# Altium PCB ButtonBoard.PcbDoc
Units mm, origin at the board's own origin, x right, y up, seen from the top; angles counter-clockwise.
Board outline 75 x 40 mm, 2 copper layers (Top Layer, Bottom Layer); 18 components, 18 nets, 76 pads, 0 vias.
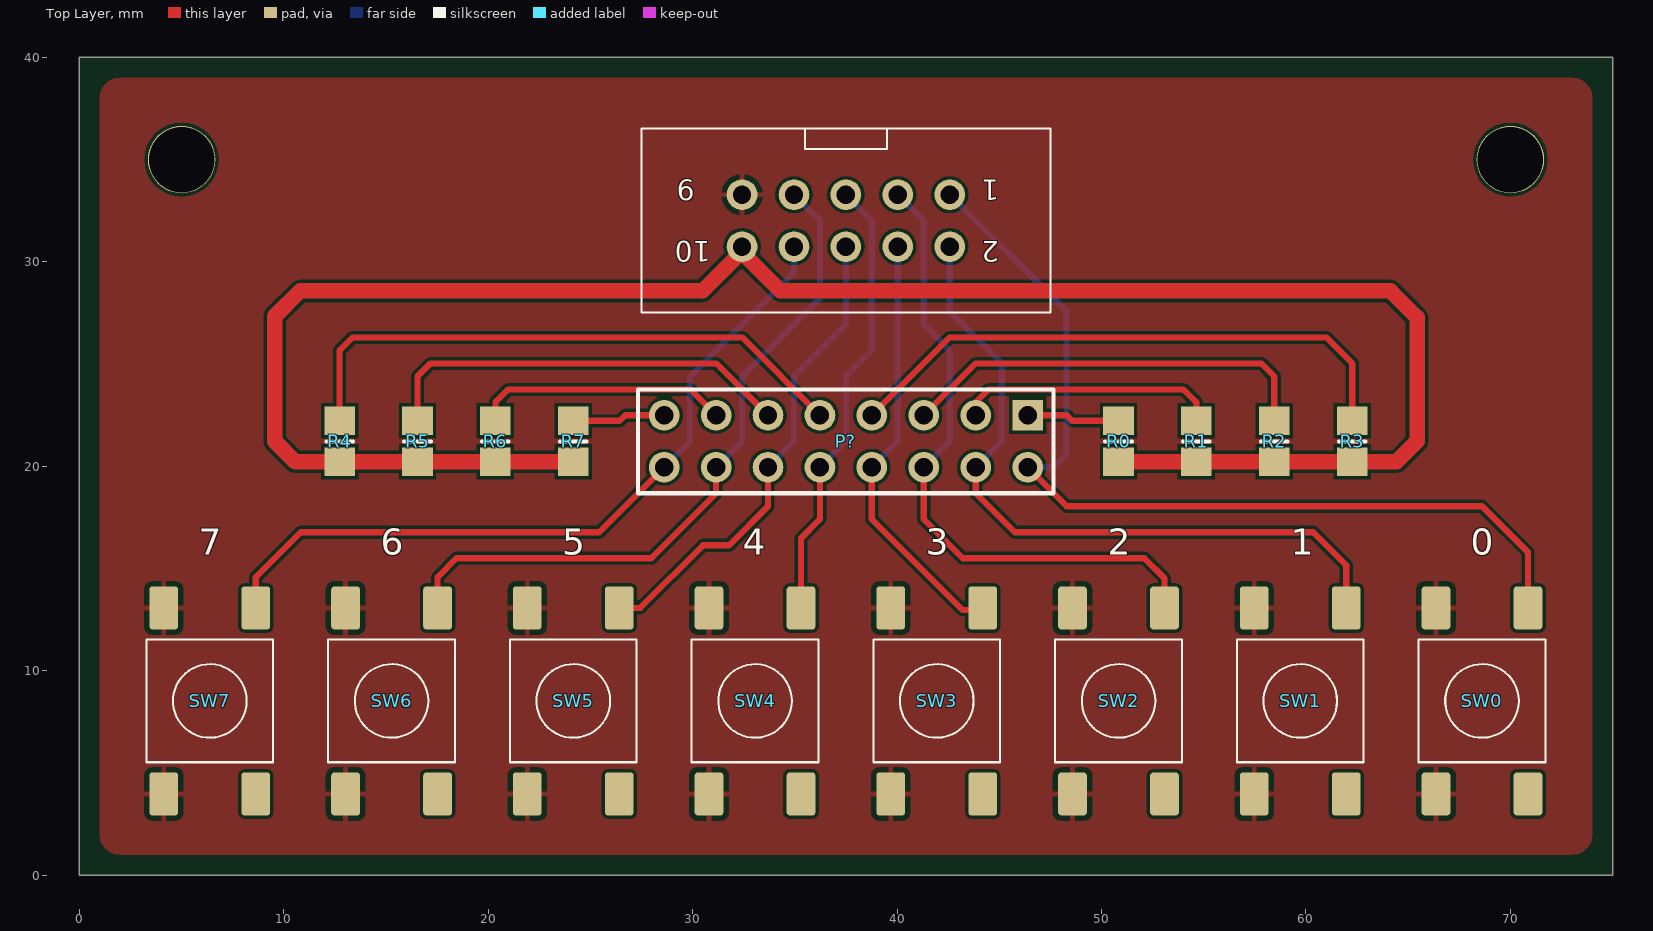
[diagram p0: Top Layer view]
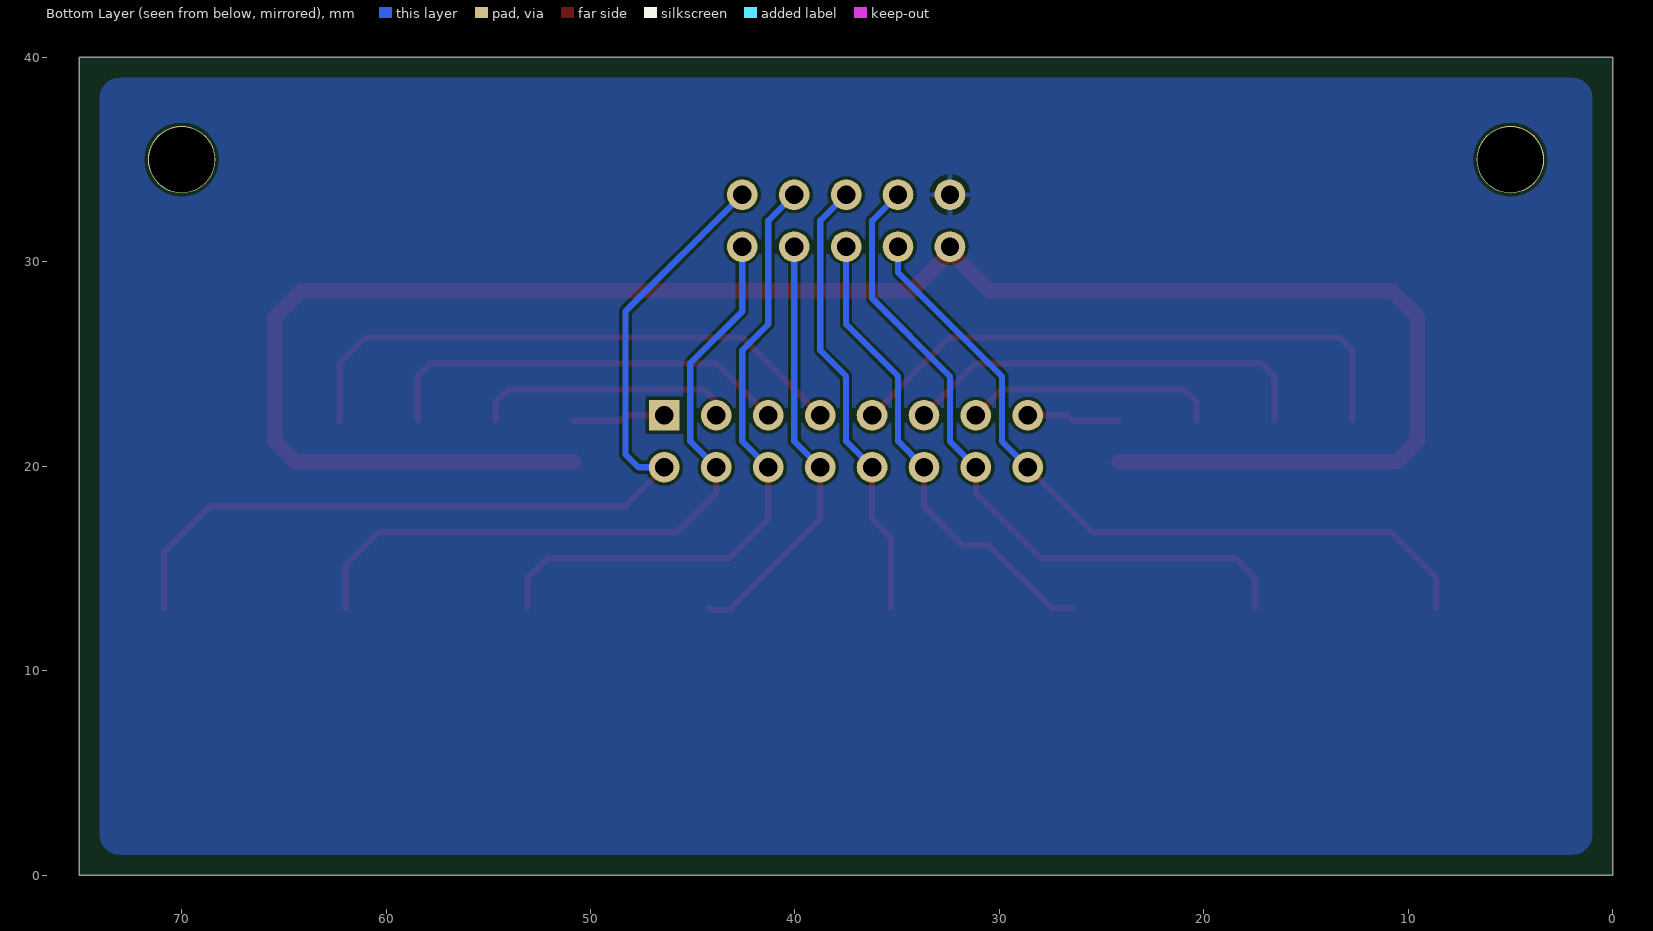
[diagram p1: Bottom Layer view, seen from below]

## Layer stack, top to bottom
Top Layer: signal copper 0.0356
Dielectric: dielectric 0.32, FR-4, Dk 4.8
Bottom Layer: signal copper 0.0356

## Board outline
0,0 75,0 75,40 0,40

## Design rules (kind name [scope] priority, off if disabled: settings)
Clearance [All] p1: gap=0.152
Height [All] p1: minheight=0 maxheight=100 prefheight=12.7
HoleSize [All] p1: absolutevalues=TRUE maxlimit=5 minlimit=0.025 maxpercent=80.000 minpercent=20.000
MinimumSolderMaskSliver [All] p1: minsoldermaskwidth=0.152
PolygonConnect [All] p1: connectstyle=Relief reliefconductorwidth=0.254 reliefentries=4 polygonreliefangle="90 Angle" airgapwidth=0.254
RoutingVias [All] p1: holewidth=0.711 width=1.27 viastyle="Through Hole" minholewidth=0.711 minwidth=1.27 maxholewidth=0.711 maxwidth=1.27
SilkToSilkClearance [All] p1 off: silktosilkclearance=0.152
SilkscreenOverComponentPads [All] p1 off: minsilkscreentomaskgap=0.152
SolderMaskExpansion [All] p1: expansion=0.102
Width [All] p1: maxlimit=2 minlimit=0.152 preferedwidth=0.254
23 further rules are at their usual default settings.

## Components (designator, comment, footprint, x,y, rotation, side; value= is the part's Value field where it differs from the comment)
P? "Header 8X2" HDR2X8 46.385,22.49 r180 top
R0 "Res2" 6-0805_M 50.83,21.22 r90 top
R1 "Res2" 6-0805_M 54.64,21.22 r90 top
R2 "Res2" 6-0805_M 58.45,21.22 r90 top
R3 "Res2" 6-0805_M 62.26,21.22 r90 top
R4 "Res2" 6-0805_M 12.73,21.22 r90 top
R5 "Res2" 6-0805_M 16.54,21.22 r90 top
R6 "Res2" 6-0805_M 20.35,21.22 r90 top
R7 "Res2" 6-0805_M 24.16,21.22 r90 top
SW0 "Generic SMD Switch" "SMD Switch" 68.61,8.52 r90 top
SW1 "Generic SMD Switch" "SMD Switch" 59.72,8.52 r90 top
SW2 "Generic SMD Switch" "SMD Switch" 50.83,8.52 r90 top
SW3 "Generic SMD Switch" "SMD Switch" 41.94,8.52 r90 top
SW4 "Generic SMD Switch" "SMD Switch" 33.05,8.52 r90 top
SW5 "Generic SMD Switch" "SMD Switch" 24.16,8.52 r90 top
SW6 "Generic SMD Switch" "SMD Switch" 15.27,8.52 r90 top
SW7 "Generic SMD Switch" "SMD Switch" 6.38,8.52 r90 top
? "10 pol Header" "10 pol Header" 37.495,32.015 r180 top

## Footprints (in the part's own frame and the unit in brackets; to place one, negate y for a bottom-side part, rotate by r counter-clockwise, add the part's x,y. Pads: shape width x height; smd on the part's side, far side on the other; paste and mask are expansions set on the pad)
6-0805_M [mm] "Chip Resistor, Body 2.0x1.2mm, IPC Low Density"
  rect 1.4x1.5 smd: 1(-1,0) 2(1,0)
  silkscreen extent 0,-0.65 0,0.65, body extent -1.07,-0.7 1.07,0.7, height 0.7
"10 pol Header" [mm]
  round 1.5 hole 0.9: 1(-5.08,-1.27) 2(-5.08,1.27) 3(-2.54,-1.27) 4(-2.54,1.27) 5(0,-1.27) 6(0,1.27) 7(2.54,-1.27) 8(2.54,1.27) 9(5.08,-1.27) 10(5.08,1.27)
  silkscreen extent -10,-4.5 10,4.5, body extent -10,-4.5 10,4.5, height 9
HDR2X8 [mm] "Connector; Header; 8x2 Position"
  rect 1.5x1.5 hole 0.9: 1(0,0)
  round 1.5 hole 0.9: 2(0,2.54) 3(2.54,0) 4(2.54,2.54) 5(5.08,0) 6(5.08,2.54) 7(7.62,0) 8(7.62,2.54) 9(10.16,0) 10(10.16,2.54) 11(12.7,0) 12(12.7,2.54) 13(15.24,0) 14(15.24,2.54) 15(17.78,0) 16(17.78,2.54)
  silkscreen extent -1.27,-1.27 19.05,3.81
"SMD Switch" [mm]
  rrect20% 2.1x1.4 smd: 1(-4.55,2.25) 2(4.55,2.25) 3(-4.55,-2.25) 4(4.55,-2.25)
  silkscreen extent -3,-3.1 3,3.1

## Part data
P?: "Header, 8-Pin, Dual row"
R0 R1 R2 R3 R4 R5 R6 R7: "Resistor"

## Free pads (board coordinates)
  round 3.3 hole 3.2: 0(5,35) 0(70,35)

## Nets (pads, with @x,y where several pads share a name; then routed paths per layer and width w, separated by ;. In a path a pad name is that pad's centre, name@x,y a point inside that pad or via, vN(x,y) a via of type N, cw(c..) or ccw(c..) an arc to the next point about the centre after c; other vN are vias at no path point)
GND: ?.9 SW0.1 SW0.2 SW1.1 SW1.2 SW2.1 SW2.2 SW3.1 SW3.2 SW4.1 SW4.2 SW5.1 SW5.2 SW6.1 SW6.2 SW7.1 SW7.2
NetP?_1: P?.1 R0.2 | length 4.6
  Top Layer w0.305: P?.1 48.29,22.49 48.56,22.22 R0.2
NetP?_3: P?.3 R1.2 | length 12.9
  Top Layer w0.305: P?.3 43.845,23.125 44.48,23.76 54.005,23.76 54.64,23.125 R1.2
NetP?_5: P?.5 R2.2 | length 20.6
  Top Layer w0.305: P?.5 43.845,25.03 57.815,25.03 58.45,24.395 R2.2
NetP?_7: P?.7 R3.2 | length 28.4
  Top Layer w0.305: P?.7 42.575,26.3 60.99,26.3 62.26,25.03 R3.2
NetP?_9: P?.9 R4.2 | length 28.8
  Top Layer w0.305: R4.2 12.73,25.665 13.365,26.3 32.415,26.3 P?.9
NetP?_11: P?.11 R5.2 | length 20.6
  Top Layer w0.305: R5.2 16.54,24.395 17.175,25.03 31.145,25.03 P?.11
NetP?_13: P?.13 R6.2 | length 12.5
  Top Layer w0.305: R6.2 20.35,23.125 20.985,23.76 29.875,23.76 P?.13
NetP?_15: P?.15 R7.2 | length 4.6
  Top Layer w0.305: R7.2 26.43,22.22 26.7,22.49 P?.15
S0: ?.1 P?.2 SW0.4 | length 46.2
  Top Layer w0.305: P?.2 48.29,18.045 68.61,18.045 70.86,15.795 SW0.4
  Bottom Layer w0.305: ?.1 48.29,27.57 48.29,20.585 47.655,19.95 P?.2
S1: ?.2 P?.4 SW1.4 | length 35.3
  Top Layer w0.305: P?.4 43.845,18.68 45.75,16.775 60.355,16.775 61.97,15.16 SW1.4
  Bottom Layer w0.305: ?.2 42.575,28.84 42.575,27.57 45.115,25.03 45.115,21.22 P?.4
S2: ?.3 P?.6 SW2.4 | length 31.9
  Top Layer w0.305: P?.6 41.305,17.41 43.21,15.505 52.1,15.505 53.08,14.525 SW2.4
  Bottom Layer w0.305: ?.3 41.305,32.015 41.305,26.935 42.575,25.665 42.575,21.22 P?.6
S3: ?.4 P?.8 SW3.4 | length 21.2
  Top Layer w0.305: P?.8 38.765,17.41 43.21,12.965 44.085,12.965 SW3.4
  Bottom Layer w0.305: P?.8 40.035,21.22 ?.4
S4: ?.5 P?.10 SW4.4 | length 22.2
  Top Layer w0.305: SW4.4 35.3,16.485 36.225,17.41 P?.10
  Bottom Layer w0.305: P?.10 37.495,21.22 37.495,24.395 38.765,25.665 38.765,32.015 ?.5
S5: ?.6 P?.12 SW5.4 | length 23.6
  Top Layer w0.305: SW5.4 27.44,13.07 30.51,16.14 31.78,16.14 33.685,18.045 P?.12
  Bottom Layer w0.305: P?.12 34.955,21.22 34.955,24.395 37.495,26.935 ?.6
S6: ?.7 P?.14 SW6.4 | length 34.1
  Top Layer w0.305: SW6.4 17.52,14.58 18.445,15.505 27.97,15.505 31.145,18.68 P?.14
  Bottom Layer w0.305: P?.14 32.415,21.22 32.415,24.395 36.225,28.205 36.225,32.015 ?.7
S7: ?.8 P?.16 SW7.4 | length 37.1
  Top Layer w0.305: SW7.4 8.63,14.58 10.825,16.775 25.43,16.775 P?.16
  Bottom Layer w0.305: P?.16 29.875,21.22 29.875,24.395 34.955,29.475 ?.8
VCC: ?.10 R0.1 R1.1 R2.1 R3.1 R4.1 R5.1 R6.1 R7.1 | length 101.2
  Top Layer w0.762: R7.1 R6.1 R5.1 R4.1 10.555,20.22 9.555,21.22 9.555,27.335 10.795,28.575 30.48,28.575 32.415,30.51 ?.10 32.415,30.45 34.29,28.575 64.135,28.575 65.435,27.275 65.435,21.22 64.435,20.22 R3.1 R2.1 R1.1 R0.1
pads on no net: SW0.3 SW1.3 SW2.3 SW3.3 SW4.3 SW5.3 SW6.3 SW7.3

## Polygon pours and split planes (outlines as drawn)
GND on Bottom Layer "GND" (solid, pour order 4): 1,38 cw(c2,38) 2,39 73,39 cw(c73,38) 74,38 74,2 cw(c73,2) 73,1 2,1 cw(c2,2) 1,2 1,38
GND on Top Layer "GND" (solid, pour order 2): 1,2 1,38 cw(c2,38) 2,39 73,39 cw(c73,38) 74,38 74,2 cw(c73,2) 73,1 2,1 cw(c2,2) 1,2

## Silkscreen, mask and mechanical layers (free items; w line width, h text height)
Top Overlay:
  text "7" at 5.842,15.24 h2.2
  text "6" at 14.732,15.24 h2.2
  text "5" at 23.622,15.24 h2.2
  text "4" at 32.461,15.24 h2.2
  text "3" at 41.402,15.24 h2.2
  text "2" at 50.292,15.24 h2.2
  text "1" at 59.258,15.24 h2.2
  text "0" at 68.072,15.24 h2.2

## Text inside footprints (layer, text, board x,y; h text height)
?: Top Overlay "10" at 30.895,31.015 h1 r180; Top Overlay "9" at 30.095,34.015 h1 r180; Top Overlay "2" at 44.995,31.015 h1 r180; Top Overlay "1" at 44.995,34.015 h1 r180